# Altium PCB Key_Matrix.PcbDoc
Units mil, origin at the board's own origin, x right, y up, seen from the top; angles counter-clockwise.
Board outline 4298.33 x 3118.08 mil, 2 copper layers (Top Layer, Bottom Layer); 43 components, 26 nets, 124 pads, 369 vias.
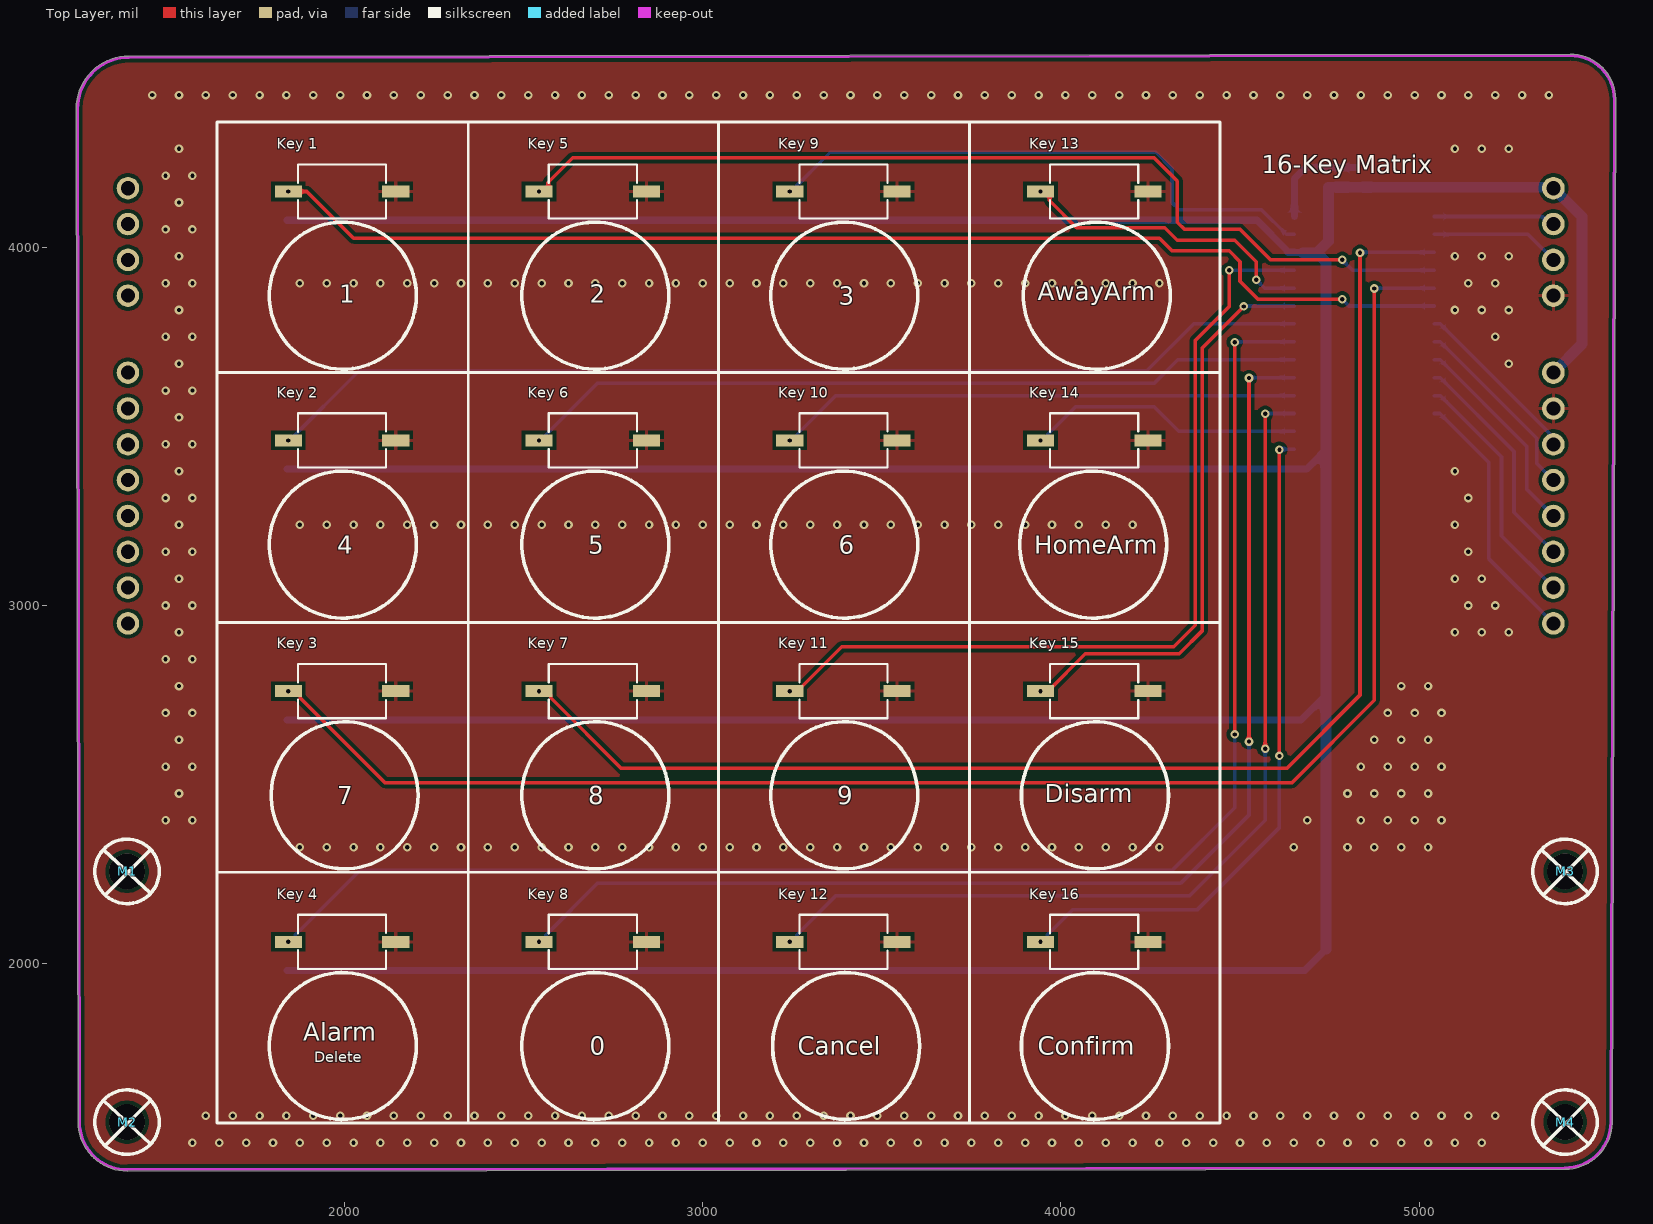
[diagram p0: Top Layer view]
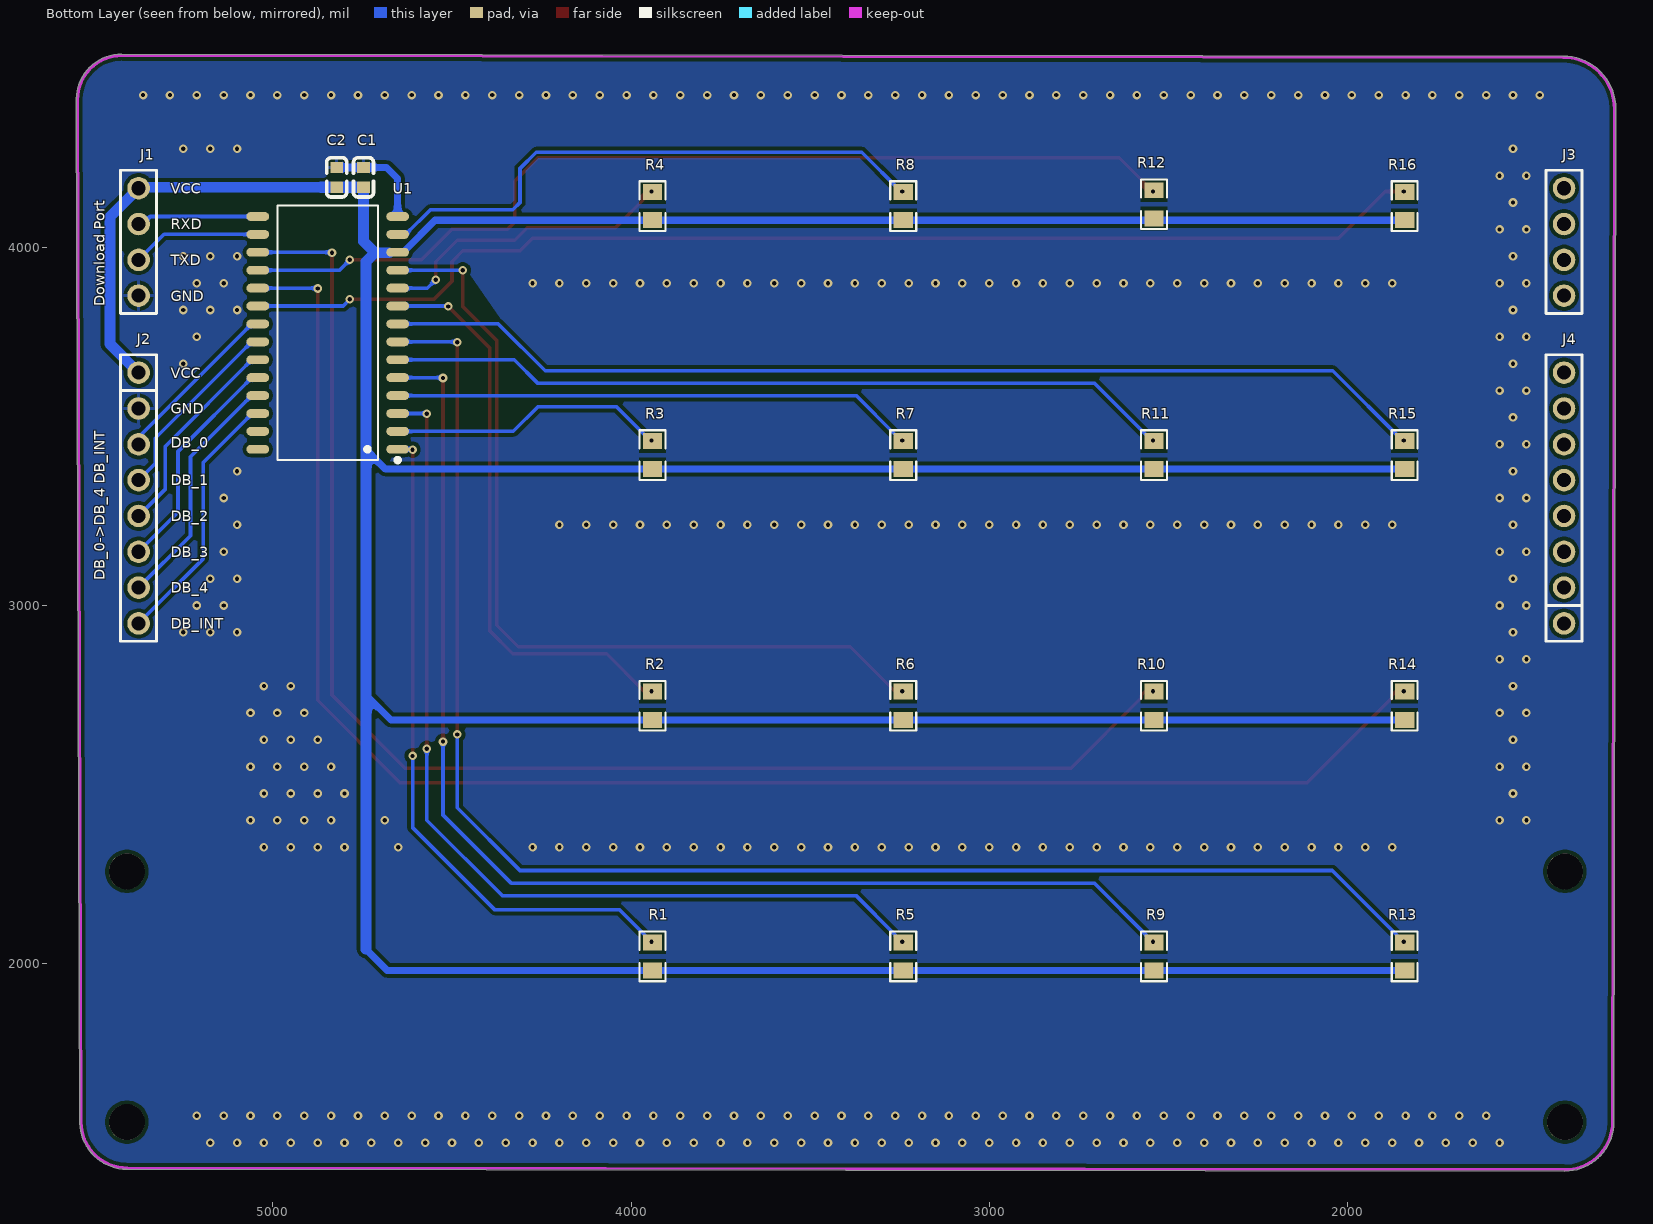
[diagram p1: Bottom Layer view, seen from below]
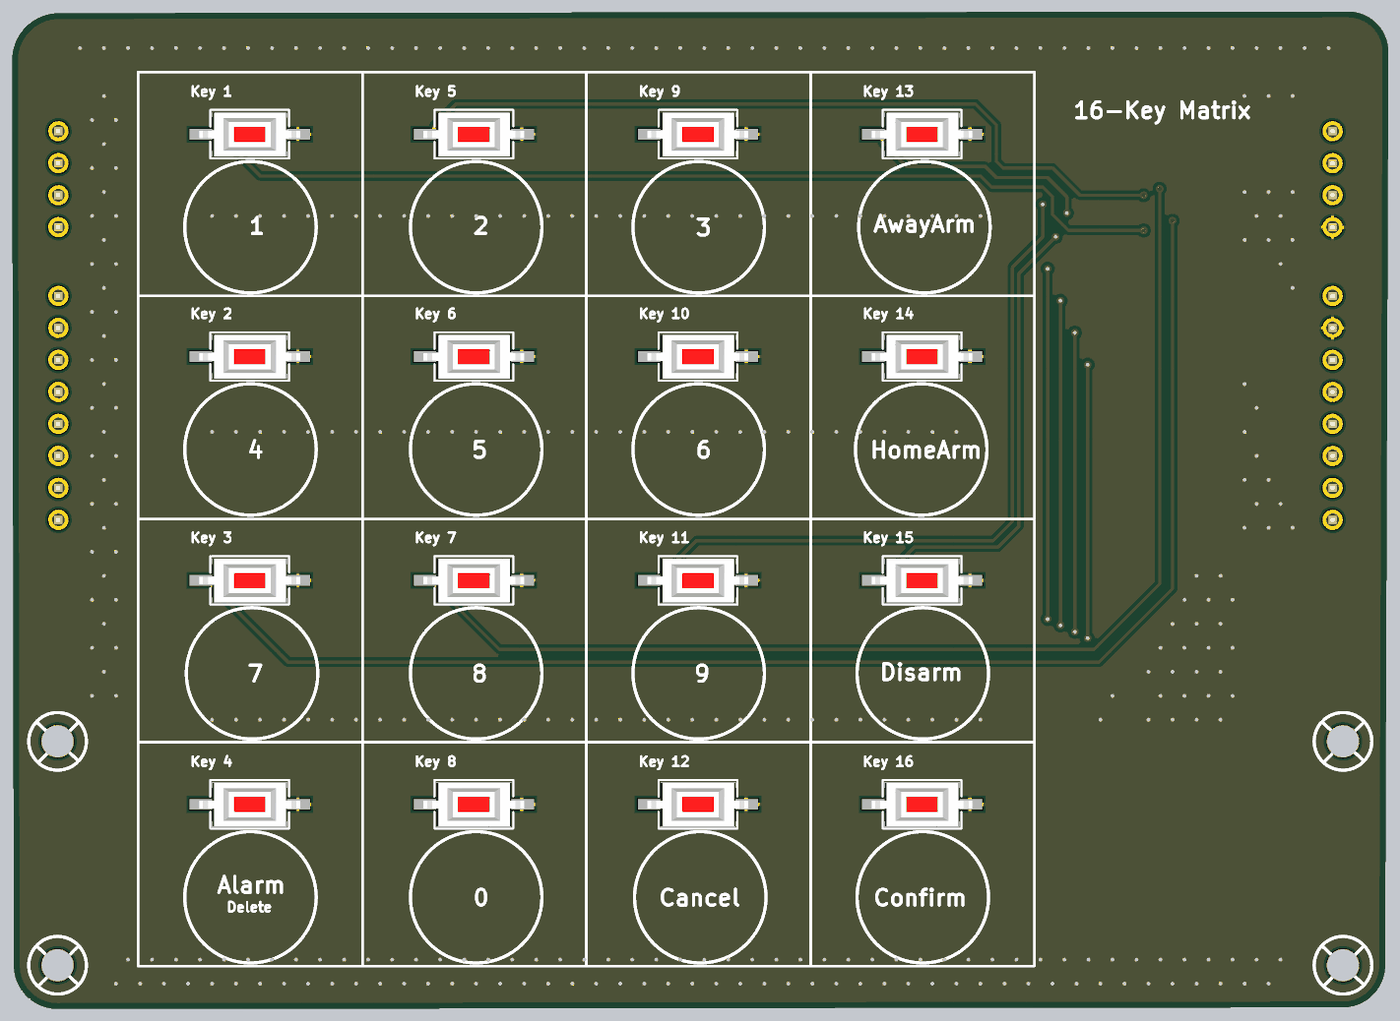
[diagram p2: 3D render of the assembled board from above, using the file's embedded part models]
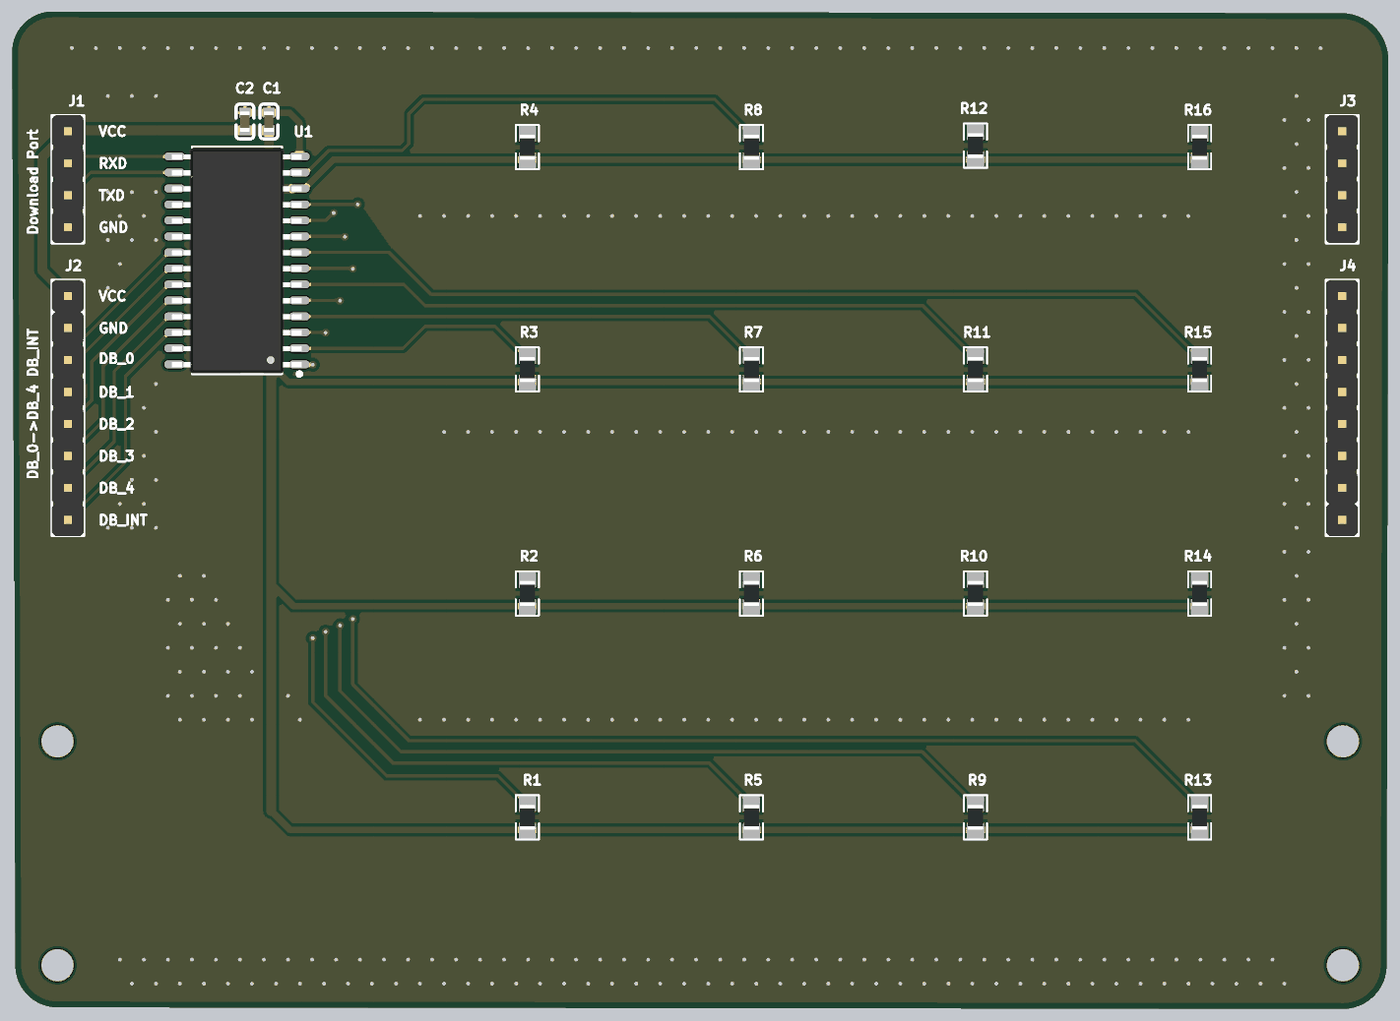
[diagram p3: 3D render of the assembled board from below, using the file's embedded part models]

## Layer stack, top to bottom
Top Solder: solder mask 0.4, Solder Resist, Dk 3.5
Top Layer: signal copper 1.4
Dielectric 1: dielectric 12.6, FR-4, Dk 4.8
Bottom Layer: signal copper 1.4
Bottom Solder: solder mask 0.4, Solder Resist, Dk 3.5

## Board outline
1392.5,1420.96 cw(c1392.5,1557.5) 1255.96,1557.5 1255.98,1557.88 1250.68,4387.15 cw(c1397.56,4387.15) 1397.56,4534.04 5422.5,4539.04 cw(c5422.5,4412.5) 5549.01,4415.08 5549,4411.96 5539.02,1557.84 5539.01,1554.92 cw(c5407.5,1557.5) 5407.51,1425.96

## Design rules (kind name [scope] priority, off if disabled: settings)
Clearance [All] p1: gap=10 ignorepadtopadclearanceinfootprint=FALSE except(0: Arc-Hole Track-Hole SMDPad-Hole THPad-Hole Via-Hole Fill-Hole Poly-Hole Region-Hole Text-Hole)
PolygonConnect PolygonConnect_Via [IsVia] p1: connectstyle=Direct reliefconductorwidth=10 reliefentries=4 polygonreliefangle="90 Angle" airgapwidth=10
PolygonConnect PolygonConnect_Pad [All] p2: connectstyle=Relief reliefconductorwidth=10 reliefentries=4 polygonreliefangle="90 Angle" airgapwidth=10
RoutingVias [All] p1: holewidth=28 width=50 viastyle="Through Hole" minholewidth=28 minwidth=50 maxholewidth=28 maxwidth=50
SolderMaskExpansion [All] p1: expansion=4 istentingtop=FALSE
Width Routing [All] p1: maxlimit=40 minlimit=10 preferedwidth=10 minimp=50.000000 maximp=50.000000 favimp=50.000000
Width GND [InNet('GND')] p2: maxlimit=50 minlimit=10 preferedwidth=20 minimp=50.000000 maximp=50.000000 favimp=50.000000
Width VCC [InNet('VCC')] p3: maxlimit=50 minlimit=10 preferedwidth=20 minimp=50.000000 maximp=50.000000 favimp=50.000000
30 further rules are at their usual default settings.

## Components (designator, comment, footprint, x,y, rotation, side; value= is the part's Value field where it differs from the comment)
C1 "100nF" C0603 4745,4195 r270 bottom
C2 "100nF" C0603 4820,4195 r270 bottom
J1 "PinHeader_4Pin" PinHeader_4Pin-2.54mm 5375,4015 r270 bottom
J2 "PinHeader_8Pin" PinHeader_8Pin-2.54mm 5375,3300 r270 bottom
J3 "PinHeader_4Pin" PinHeader_4Pin-2.54mm 1395,4015 r90 bottom
J4 "PinHeader_8Pin" PinHeader_8Pin-2.54mm 1395,3300 r90 bottom
"Key 1" "CK_RS282G05A3" "Tactile Button_SMD-SPST_L6.1-W3.7-H2.5" 1995,4155 r0 top (schematic designator S16)
"Key 2" "CK_RS282G05A3" "Tactile Button_SMD-SPST_L6.1-W3.7-H2.5" 1995,3460 r0 top (schematic designator S15)
"Key 3" "CK_RS282G05A3" "Tactile Button_SMD-SPST_L6.1-W3.7-H2.5" 1995,2760 r0 top (schematic designator S14)
"Key 4" "CK_RS282G05A3" "Tactile Button_SMD-SPST_L6.1-W3.7-H2.5" 1995,2060 r0 top (schematic designator S13)
"Key 5" "CK_RS282G05A3" "Tactile Button_SMD-SPST_L6.1-W3.7-H2.5" 2695,4155 r0 top (schematic designator S12)
"Key 6" "CK_RS282G05A3" "Tactile Button_SMD-SPST_L6.1-W3.7-H2.5" 2695,3460 r0 top (schematic designator S11)
"Key 7" "CK_RS282G05A3" "Tactile Button_SMD-SPST_L6.1-W3.7-H2.5" 2695,2760 r0 top (schematic designator S10)
"Key 8" "CK_RS282G05A3" "Tactile Button_SMD-SPST_L6.1-W3.7-H2.5" 2695,2060 r0 top (schematic designator S9)
"Key 9" "CK_RS282G05A3" "Tactile Button_SMD-SPST_L6.1-W3.7-H2.5" 3395,4155 r0 top (schematic designator S8)
"Key 10" "CK_RS282G05A3" "Tactile Button_SMD-SPST_L6.1-W3.7-H2.5" 3395,3460 r0 top (schematic designator S7)
"Key 11" "CK_RS282G05A3" "Tactile Button_SMD-SPST_L6.1-W3.7-H2.5" 3395,2760 r0 top (schematic designator S6)
"Key 12" "CK_RS282G05A3" "Tactile Button_SMD-SPST_L6.1-W3.7-H2.5" 3395,2060 r0 top (schematic designator S5)
"Key 13" "CK_RS282G05A3" "Tactile Button_SMD-SPST_L6.1-W3.7-H2.5" 4095,4155 r0 top (schematic designator S4)
"Key 14" "CK_RS282G05A3" "Tactile Button_SMD-SPST_L6.1-W3.7-H2.5" 4095,3460 r0 top (schematic designator S3)
"Key 15" "CK_RS282G05A3" "Tactile Button_SMD-SPST_L6.1-W3.7-H2.5" 4095,2760 r0 top (schematic designator S2)
"Key 16" "CK_RS282G05A3" "Tactile Button_SMD-SPST_L6.1-W3.7-H2.5" 4095,2060 r0 top (schematic designator S1)
M1 "PCB Mounting Hole" "PCB Mounting Hole" 1395,2255 r0 top
M2 "PCB Mounting Hole" "PCB Mounting Hole" 1395,1555 r0 top
M3 "PCB Mounting Hole" "PCB Mounting Hole" 5410,2255 r0 top
M4 "PCB Mounting Hole" "PCB Mounting Hole" 5410,1555 r0 top
R1 "10KΩ" R0805 3940,2020 r270 bottom
R2 "10KΩ" R0805 3940,2720 r270 bottom
R3 "10KΩ" R0805 3940,3420 r270 bottom
R4 "10KΩ" R0805 3940,4115 r270 bottom
R5 "10KΩ" R0805 3240,2020 r270 bottom
R6 "10KΩ" R0805 3240,2720 r270 bottom
R7 "10KΩ" R0805 3240,3420 r270 bottom
R8 "10KΩ" R0805 3240,4115 r270 bottom
R9 "10KΩ" R0805 2540,2020 r270 bottom
R10 "10KΩ" R0805 2540,2720 r270 bottom
R11 "10KΩ" R0805 2540,3420 r270 bottom
R12 "10KΩ" R0805 2540,4120 r270 bottom
R13 "10KΩ" R0805 1840,2020 r270 bottom
R14 "10KΩ" R0805 1840,2720 r270 bottom
R15 "10KΩ" R0805 1840,3420 r270 bottom
R16 "10KΩ" R0805 1840,4115 r270 bottom
U1 "STC15W408S" SOIC_28Pin-L17.9-W7.5 4845,3760 r0 bottom

## Footprints (in the part's own frame and the unit in brackets; to place one, negate y for a bottom-side part, rotate by r counter-clockwise, add the part's x,y. Pads: shape width x height; smd on the part's side, far side on the other; paste and mask are expansions set on the pad)
C0603 [mm]
  rect 0.8x0.9 smd: 1(-0.707,-0.052) 2(0.693,-0.052)
  silkscreen extent -1.4,-0.76 1.38,0.66, body extent -0.8,-0.46 0.8,0.34, height 0.8
"PCB Mounting Hole" [mil]
  round 100 hole 100 paste-99999 mask+4: 1(-2.5,2.5)
  silkscreen extent -92,-87 88,92
PinHeader_4Pin-2.54mm [mm]
  round 1.6 hole 1: 1(-3.81,0) 2(-1.27,0) 3(1.27,0) 4(3.81,0)
  silkscreen extent -5.08,-1.27 5.08,1.27, body extent -5.08,-1.27 5.08,1.27, height 8.54
PinHeader_8Pin-2.54mm [mm]
  round 1.6 hole 1: 1(-8.89,0) 2(-6.35,0) 3(-3.81,0) 4(-1.27,0) 5(1.27,0) 6(3.81,0) 7(6.35,0) 8(8.89,0)
  silkscreen extent -10.16,-1.27 10.16,1.27, body extent -10.16,-1.27 10.16,1.27, height 8.54
R0805 [mm]
  rect 1.133x1.377 smd paste-100 mask+0.051: 1(-1,0) 2(1,0)
  silkscreen extent -1.76,-0.92 1.76,0.92, body extent -1,-0.6 1,0.6, height 0.45
SOIC_28Pin-L17.9-W7.5 [mm]
  oval 1.615x0.63 smd: 1(-4.907,8.227) 2(-4.907,6.957) 3(-4.907,5.687) 4(-4.907,4.417) 5(-4.907,3.147) 6(-4.907,1.877) 7(-4.907,0.607) 8(-4.907,-0.663) 9(-4.907,-1.933) 10(-4.907,-3.203) 11(-4.907,-4.473) 12(-4.907,-5.743) 13(-4.907,-7.013) 14(-4.907,-8.283) 15(5.008,-8.283) 16(5.008,-7.013) 17(5.008,-5.743) 18(5.008,-4.473) 19(5.008,-3.203) 20(5.008,-1.933) 21(5.008,-0.663) 22(5.008,0.607) 23(5.008,1.877) 24(5.008,3.147) 25(5.008,4.417) 26(5.008,5.687) 27(5.008,6.957) 28(5.008,8.227)
  silkscreen extent -5.06,-9.05 3.62,9.14, body extent -5.09,-8.95 5.21,8.95, height 2.75
"Tactile Button_SMD-SPST_L6.1-W3.7-H2.5" [mm] "3x6x2.5mm, 2Pin"
  rect 1.92x0.84 smd: 1(3.754,0.021) 2(-3.866,0.021)
  silkscreen extent -3.18,-1.91 3.07,1.95, body extent -4.06,-1.75 3.94,1.75, height 2.5

## Part data
C1 C2: library part Capacitor_0603
J1 J2 J3 J4: "Straight Single Row, Square Pitch, 2.54mm"
"Key 1" "Key 2" "Key 3" "Key 4" "Key 5" "Key 6" "Key 7" "Key 8" "Key 9" "Key 10" "Key 11" "Key 12" "Key 13" "Key 14" "Key 15" "Key 16": library part Button_Push_2Pin_SMD
M1 M2 M3 M4: "Mounting Hole"
R1 R2 R3 R4 R5 R6 R7 R8 R9 R10 R11 R12 R13 R14 R15 R16: library part Resistor_0805
U1: library part STC15W408S_SOP28

## Via types
v1: diameter 24, hole 12, Top Layer to Bottom Layer, tented both sides, 369 vias

## Nets (pads, with @x,y where several pads share a name; then routed paths per layer and width w, separated by ;. In a path a pad name is that pad's centre, name@x,y a point inside that pad or via, vN(x,y) a via of type N, cw(c..) or ccw(c..) an arc to the next point about the centre after c; other vN are vias at no path point)
DB_0: J2.3 U1.21 | length 483.8
  Bottom Layer w10: U1.21 5058.88,3786.12 5364.86,3480.14 5364.86,3460.14 J2.3
DB_1: J2.4 U1.22 | length 533.8
  Bottom Layer w10: U1.22 5058.88,3736.12 5328.5,3466.5 5328.5,3396.5 J2.4
DB_2: J2.5 U1.23 | length 583.8
  Bottom Layer w10: U1.23 5058.88,3686.12 5300,3445 5300,3325 J2.5
DB_3: J2.6 U1.24 | length 633.8
  Bottom Layer w10: U1.24 5058.88,3636.12 5265,3430 5265,3260 J2.6
DB_4: J2.7 U1.25 | length 683.8
  Bottom Layer w10: U1.25 5058.88,3586.12 5230,3415 5230,3195 J2.7
DB_INT: J2.8 U1.26 | length 733
  Bottom Layer w10: U1.26 5057.54,3536.12 5195,3398.66 5195,3130 J2.8
GND: "Key 1.1" "Key 2.1" "Key 3.1" "Key 4.1" "Key 5.1" "Key 6.1" "Key 7.1" "Key 8.1" "Key 9.1" "Key 10.1" "Key 11.1" "Key 12.1" "Key 13.1" "Key 14.1" "Key 15.1" "Key 16.1" C1.1 C2.1 J1.4 J2.2 U1.14 | length 288.8
  Bottom Layer w20: U1.14 4651.79,4191.79 4682.84,4222.84 C1.1 C2.1
  other v1: 1575,1500 1650,1500 1725,1500 1800,1500 1875,1500 1950,1500 2025,1500 2100,1500 2175,1500 2250,1500 2325,1500 2400,1500 2475,1500 2550,1500 2625,1500 2700,1500 2775,1500 2850,1500 2925,1500 3000,1500 3075,1500 3150,1500 3225,1500 3300,1500 3375,1500 3450,1500 3525,1500 3600,1500 3675,1500 3750,1500 3825,1500 3900,1500 3975,1500 4050,1500 4125,1500 4200,1500 4275,1500 4350,1500 4425,1500 4500,1500 4575,1500 4650,1500 4725,1500 4800,1500 4875,1500 4950,1500 5025,1500 5100,1500 5175,1500 1612.5,1575 1687.5,1575 1762.5,1575 1837.5,1575 1912.5,1575 1987.5,1575 2062.5,1575 2137.5,1575 2212.5,1575 2287.5,1575 2362.5,1575 2437.5,1575 2512.5,1575 2587.5,1575 2662.5,1575 2737.5,1575 2812.5,1575 2887.5,1575 2962.5,1575 3037.5,1575 3112.5,1575 3187.5,1575 3262.5,1575 3337.5,1575 3412.5,1575 3487.5,1575 3562.5,1575 3637.5,1575 3712.5,1575 3787.5,1575 3862.5,1575 3937.5,1575 4012.5,1575 4087.5,1575 4162.5,1575 4237.5,1575 4312.5,1575 4387.5,1575 4462.5,1575 4537.5,1575 4612.5,1575 4687.5,1575 4762.5,1575 4837.5,1575 4912.5,1575 4987.5,1575 5062.5,1575 5137.5,1575 5212.5,1575 1875,2325 1950,2325 2025,2325 2100,2325 2175,2325 2250,2325 2325,2325 2400,2325 2475,2325 2550,2325 2625,2325 2700,2325 2775,2325 2850,2325 2925,2325 3000,2325 3075,2325 3150,2325 3225,2325 3300,2325 3375,2325 3450,2325 3525,2325 3600,2325 3675,2325 3750,2325 3825,2325 3900,2325 3975,2325 4050,2325 4125,2325 4200,2325 4275,2325 4650,2325 4800,2325 4875,2325 4950,2325 5025,2325 1500,2400 1575,2400 4687.5,2400 4837.5,2400 4912.5,2400 4987.5,2400 5062.5,2400 1537.5,2475 4800,2475 4875,2475 4950,2475 5025,2475 1500,2550 1575,2550 4837.5,2550 4912.5,2550 4987.5,2550 5062.5,2550 1537.5,2625 4875,2625 4950,2625 5025,2625 1500,2700 1575,2700 4912.5,2700 4987.5,2700 5062.5,2700 1537.5,2775 4950,2775 5025,2775 1500,2850 1575,2850 1537.5,2925 5100,2925 5175,2925 5250,2925 1500,3000 1575,3000 5137.5,3000 5212.5,3000 1537.5,3075 5100,3075 5175,3075 1500,3150 1575,3150 5137.5,3150 1537.5,3225 1875,3225 1950,3225 2025,3225 2100,3225 2175,3225 2250,3225 2325,3225 2400,3225 2475,3225 2550,3225 2625,3225 2700,3225 2775,3225 2850,3225 2925,3225 3000,3225 3075,3225 3150,3225 3225,3225 3300,3225 3375,3225 3450,3225 3525,3225 3600,3225 3675,3225 3750,3225 3825,3225 3900,3225 3975,3225 4050,3225 4125,3225 4200,3225 5100,3225 1500,3300 1575,3300 5137.5,3300 1537.5,3375 5100,3375 1500,3450 1575,3450 1537.5,3525 1500,3600 1575,3600 1537.5,3675 5250,3675 1500,3750 1575,3750 5212.5,3750 1537.5,3825 5100,3825 5175,3825 5250,3825 1500,3900 1575,3900 1875,3900 1950,3900 2025,3900 2100,3900 2175,3900 2250,3900 2325,3900 2400,3900 2475,3900 2550,3900 2625,3900 2700,3900 2775,3900 2850,3900 2925,3900 3000,3900 3075,3900 3150,3900 3225,3900 3300,3900 3375,3900 3450,3900 3525,3900 3600,3900 3675,3900 3750,3900 3825,3900 3900,3900 3975,3900 4050,3900 4125,3900 4200,3900 4275,3900 5137.5,3900 5212.5,3900 1537.5,3975 5100,3975 5175,3975 5250,3975 1500,4050 1575,4050 1537.5,4125 1500,4200 1575,4200 1537.5,4275 5100,4275 5175,4275 5250,4275 1462.5,4425 1537.5,4425 1612.5,4425 1687.5,4425 1762.5,4425 1837.5,4425 1912.5,4425 1987.5,4425 2062.5,4425 2137.5,4425 2212.5,4425 2287.5,4425 2362.5,4425 2437.5,4425 2512.5,4425 2587.5,4425 2662.5,4425 2737.5,4425 2812.5,4425 2887.5,4425 2962.5,4425 3037.5,4425 3112.5,4425 3187.5,4425 3262.5,4425 3337.5,4425 3412.5,4425 3487.5,4425 3562.5,4425 3637.5,4425 3712.5,4425 3787.5,4425 3862.5,4425 3937.5,4425 4012.5,4425 4087.5,4425 4162.5,4425 4237.5,4425 4312.5,4425 4387.5,4425 4462.5,4425 4537.5,4425 4612.5,4425 4687.5,4425 4762.5,4425 4837.5,4425 4912.5,4425 4987.5,4425 5062.5,4425 5137.5,4425 5212.5,4425 5287.5,4425 5362.5,4425
Key_0: "Key 16.2" R1.1 U1.1 | length 1898.7
  Top Layer w10: v1(4610,2580) v1(4610,3435)
  Bottom Layer w10: v1(3942.8,2060.84) 3946.28,2060.84 3962.11,2076.66 3962.11,2080.15 4031.96,2150 4380,2150 4610,2380 v1(4610,2580) ; v1(4610,3435) 4611.12,3436.12 U1.1
Key_1: "Key 14.2" R3.1 U1.2 | length 776.5
  Bottom Layer w10: v1(3942.8,3460.84) 3946.28,3460.84 4040.44,3555 4260,3555 4328.88,3486.12 U1.2
Key_2: "Key 12.2" R5.1 U1.3 | length 2687
  Top Layer w10: v1(4570,2600) v1(4570,3535)
  Bottom Layer w10: v1(3242.8,2060.84) 3246.28,2060.84 3262.11,2076.66 3262.11,2080.15 3371.96,2190 4360,2190 4570,2400 v1(4570,2600) ; v1(4570,3535) 4571.12,3536.12 U1.3
Key_3: "Key 10.2" R7.1 U1.4 | length 1460.9
  Bottom Layer w10: v1(3242.8,3460.84) 3246.28,3460.84 3262.11,3476.66 3371.56,3586.12 U1.4
Key_4: "Key 8.2" R9.1 U1.5 | length 3478.2
  Top Layer w10: v1(4525,2620) v1(4525,3635)
  Bottom Layer w10: v1(2542.8,2060.84) 2546.28,2060.84 2562.11,2076.66 2562.11,2080.15 2706.96,2225 4335,2225 4525,2415 v1(4525,2620) ; v1(4525,3635) 4526.12,3636.12 U1.5
Key_5: "Key 6.2" R11.1 U1.6 | length 2202.3
  Bottom Layer w10: v1(2542.8,3460.84) 2546.28,3460.84 2705.44,3620 4260,3620 4326.12,3686.12 U1.6
Key_6: "Key 4.2" R13.1 U1.7 | length 4266.5
  Top Layer w10: v1(4485,2640) v1(4485,3735)
  Bottom Layer w10: v1(1842.8,2060.84) 1846.28,2060.84 1862.11,2076.66 1862.11,2080.15 2041.96,2260 4310,2260 4485,2435 v1(4485,2640) ; v1(4485,3735) 4486.12,3736.12 U1.7
Key_7: "Key 2.2" R15.1 U1.8 | length 2943.7
  Bottom Layer w10: v1(1842.8,3460.84) 1846.28,3460.84 2040.44,3655 4240,3655 4371.12,3786.12 U1.8
Key_8: "Key 15.2" R2.1 U1.9 | length 1617.2
  Top Layer w10: v1(3942.8,2760.84) 3964.06,2760.84 4068.22,2865 4330,2865 4395,2930 4395,3720 v1(4510,3835)
  Bottom Layer w10: v1(4510,3835) 4511.12,3836.12 U1.9
Key_9: "Key 13.2" R4.1 U1.10 | length 858.8
  Top Layer w10: v1(3942.8,4155.84) 3956.94,4155.84 3968.47,4144.3 3968.47,4130.16 4043.63,4055 4290,4055 4325,4020 4485,4020 4545,3960 v1(4545,3909.12)
  Bottom Layer w10: v1(4545,3909.12) 4545.88,3909.12 4568.88,3886.12 U1.10
Key_10: "Key 11.2" R6.1 U1.11 | length 2421
  Top Layer w10: v1(3242.8,2760.84) 3264.06,2760.84 3388.22,2885 4315,2885 4375,2945 4375,3740 4469.63,3834.63 v1(4469.63,3936.12)
  Bottom Layer w10: v1(4469.63,3936.12) U1.11
Key_11: "Key 9.2" R8.1 U1.13 | length 1604.7
  Bottom Layer w10: v1(3242.8,4155.84) 3246.28,4155.84 3355.44,4265 4265,4265 4310,4220 4310,4125 4330,4105 4560,4105 4628.88,4036.12 U1.13
Key_12: "Key 7.2" R10.1 U1.17 | length 3913.3
  Top Layer w10: v1(2542.8,2760.84) 2564.06,2760.84 2575.59,2749.3 2575.59,2742.18 2772.77,2545 4630,2545 4835,2750 v1(4835,3985)
  Bottom Layer w10: v1(4835,3985) 4836.12,3986.12 U1.17
Key_13: "Key 5.2" R12.1 U1.18 | length 2744
  Top Layer w10: v1(2542.8,4155.84) 2556.94,4155.84 2568.47,4167.37 2568.47,4181.51 2636.96,4250 4260,4250 4325,4185 4325,4070 4345,4050 4500,4050 4585,3965 v1(4785,3965)
  Bottom Layer w10: v1(4785,3965) 4813.88,3936.12 U1.18
Key_14: "Key 3.2" R14.1 U1.19 | length 4555.2
  Top Layer w10: v1(1842.8,2760.84) 1864.06,2760.84 1875.59,2749.3 1875.59,2742.18 2112.77,2505 4645,2505 4875,2735 v1(4875,3885)
  Bottom Layer w10: v1(4875,3885) 4876.12,3886.12 U1.19
Key_15: "Key 1.2" R16.1 U1.20 | length 3364
  Top Layer w10: v1(1842.8,4155.84) 1894.16,4155.84 2025,4025 4275,4025 4310,3990 4470,3990 4500,3960 4500,3905 4550,3855 v1(4785,3855)
  Bottom Layer w10: v1(4785,3855) 4803.88,3836.12 U1.20
RXD: J1.2 U1.15 | length 341.6
  Bottom Layer w10: U1.15 5342.65,4086.12 5363.77,4065 J1.2
TXD: J1.3 U1.16 | length 362.3
  Bottom Layer w10: U1.16 5303.88,4036.12 J1.3
VCC: C1.2 C2.2 J1.1 J2.1 R1.2 R2.2 R3.2 R4.2 R5.2 R6.2 R7.2 R8.2 R9.2 R10.2 R11.2 R12.2 R13.2 R14.2 R15.2 R16.2 U1.12 | length 15051.8
  Bottom Layer w20: R13.2 R9.2 R5.2 R1.2 4680.63,1980.63 4740,2040 ; R14.2 R10.2 R6.2 R2.2 4670.63,2680.63 4740,2750 ; R15.2 R11.2 R7.2 R3.2 4685.63,3380.63 4740,3435 ; R16.2 R8.2 R4.2 4547.07,4075.63 4631.48,3991.22 4631.48,3988.34 4633.7,3986.12 U1.12 4652.71,3985.2 4675.5,3985.2 U1.12@4675.7,3985
  Bottom Layer w30: U1.12@4675.7,3985 4715,3985 ; 4740,2040 4740,2750 4740,3435 4740,3960 4715,3985 ; J2.1 5455,3730 5455,4085 5372.28,4167.72 C2.2 C1.2 4747.05,4017.05 4715,3985
pads on no net: J3.1 J3.2 J3.3 J3.4 J4.1 J4.2 J4.3 J4.4 J4.5 J4.6 J4.7 J4.8 M1.1 M2.1 M3.1 M4.1 U1.27 U1.28

## Polygon pours and split planes (outlines as drawn)
GND on Bottom Layer "NONET_L01_P-001" (solid, remove dead copper, pour order 1): 1240,4545 5520,4545 5555,4510 5555,1415 1260,1415 1245,1430
GND on Top Layer "NONET_L01_P-001" (solid, remove dead copper, pour order 0): 1225,4570 1230,4575 5565,4575 5565,1420 5550,1405 1235,1405

## Keep-outs
Keep-Out Layer:
  lines w8: 1260,1555 1254.7,4387.16 cw(c1397.56,4387.16) 1397.56,4530.02 5422.5,4535.02 cw(c5422.5,4412.5) 5545.03,4412.5 ; 1259.98,1557.5 ccw(c1392.5,1557.5) 1392.5,1424.98 ; 1392.5,1425.08 5407.5,1429.98 ccw(c5407.5,1557.5) 5535.02,1557.5 ; 5535,1555 5545,4415

## Other copper
Bottom Layer:
  pour cut-out: 5065,4075 5065,4030 5310,4030 5350,3990 5435,3990 5435,4075 5425,4085
  pour cut-out: 4450.98,3923.66 4611.34,3923.66 4635,3900 4635,3795 4370.52,3795 4365.27,3800.25
  pour cut-out: 4691.29,4202.45 4715.56,4202.45 4725,4200 4721.56,4191.24 4721.56,4027.6 4704.44,4010.49 4684.51,4010.49 4680,4015 4682.4,4017.4 4682.4,4100.62 4672.18,4110.84 4672.18,4183.34

## Silkscreen, mask and mechanical layers (free items; w line width, h text height)
Top Overlay:
  circle w10: c4095,1770 r205.24
  circle w10: c3400,1770 r205.24
  circle w10: c2700,1770 r205.24
  circle w10: c1995,1770 r205.24
  circle w10: c4095,2470 r205.24
  circle w10: c3395,2470 r205.24
  circle w10: c2700,2470 r205.24
  circle w10: c2000,2470 r205.24
  circle w10: c4100,3865 r205.24
  circle w10: c3395,3865 r205.24
  circle w10: c2700,3865 r205.24
  circle w10: c1995,3865 r205.24
  circle w10: c4090,3170 r205.24
  circle w10: c3395,3170 r205.24
  circle w10: c2700,3170 r205.24
  circle w10: c1995,3170 r205.24
  lines w8: 1644,2952.5 4444,2952.5 ; 1645,2255 4440,2255 ; 1645,3650 4440,3650 ; 2345,1555 2345,4350 ; 3044,1555 3044,4350 ; 3745,1555 3745,4350 ; 1644,1555 1644,4350 4444,4350 4444,1555 1644,1555
  text "16-Key Matrix" at 4560,4206.66 h50
  text "AwayArm" at 3935,3851.66 h50
  text "1" at 1985,3845 h50
  text "2" at 2685,3845 h50
  text "3" at 3380,3840 h50
  text "4" at 1980,3145 h50
  text "5" at 2680,3145 h50
  text "6" at 3380,3145 h50
  text "HomeArm" at 3925,3145 h50
  text "Disarm" at 3955,2450 h50
  text "7" at 1980,2445 h50
  text "8" at 2680,2445 h50
  text "9" at 3375,2445 h50
  text "Alarm" at 1885,1785 h50
  text "0" at 2685,1745 h50
  text "Cancel" at 3265,1745 h50
  text "Confirm" at 3935,1745 h50
  text "Delete" at 1915,1725 h30
Bottom Overlay:
  text "VCC" at 5285,4150 h30
  text "RXD" at 5285,4050 h30
  text "TXD" at 5285,3950 h30
  text "GND" at 5285,3850 h30
  text "Download Port" at 5470,3835 h30 r270
  text "VCC" at 5285,3635 h30
  text "GND" at 5285,3535 h30
  text "DB_0" at 5285,3440 h30
  text "DB_1" at 5285,3335 h30
  text "DB_2" at 5285,3235 h30
  text "DB_3" at 5285,3135 h30
  text "DB_0->DB_4 DB_INT" at 5470,3070 h30 r270
  text "DB_4" at 5285,3035 h30
  text "DB_INT" at 5285,2935 h30